# Altium PCB BSPD.PcbDoc
Units mm, origin at the board's own origin, x right, y up, seen from the top; angles counter-clockwise.
Board outline 58.66 x 69.09 mm, 2 copper layers (Top Layer, Bottom Layer), stack 1.671 mm thick; 58 components, 44 nets, 223 pads, 80 vias.
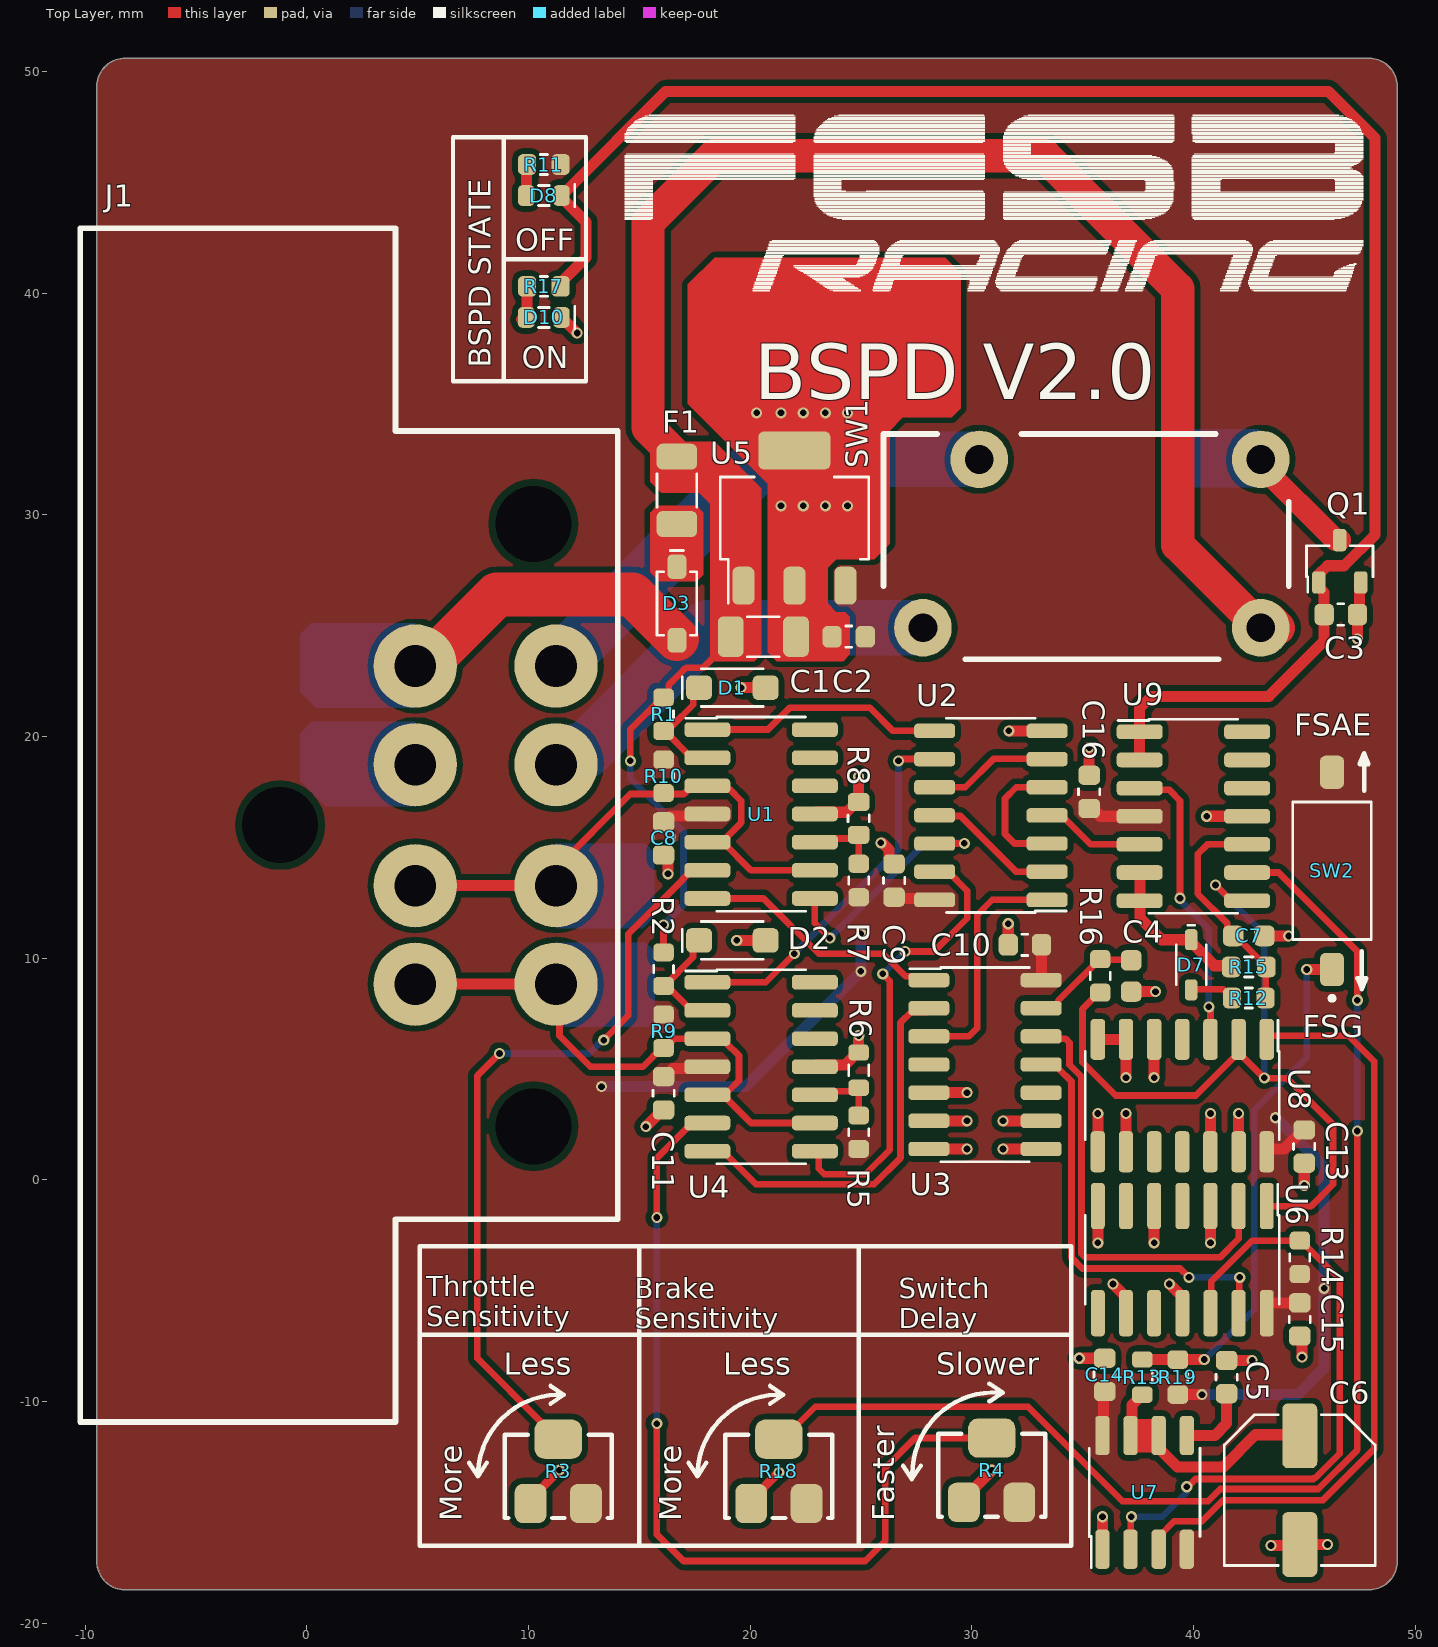
[diagram p0: Top Layer view]
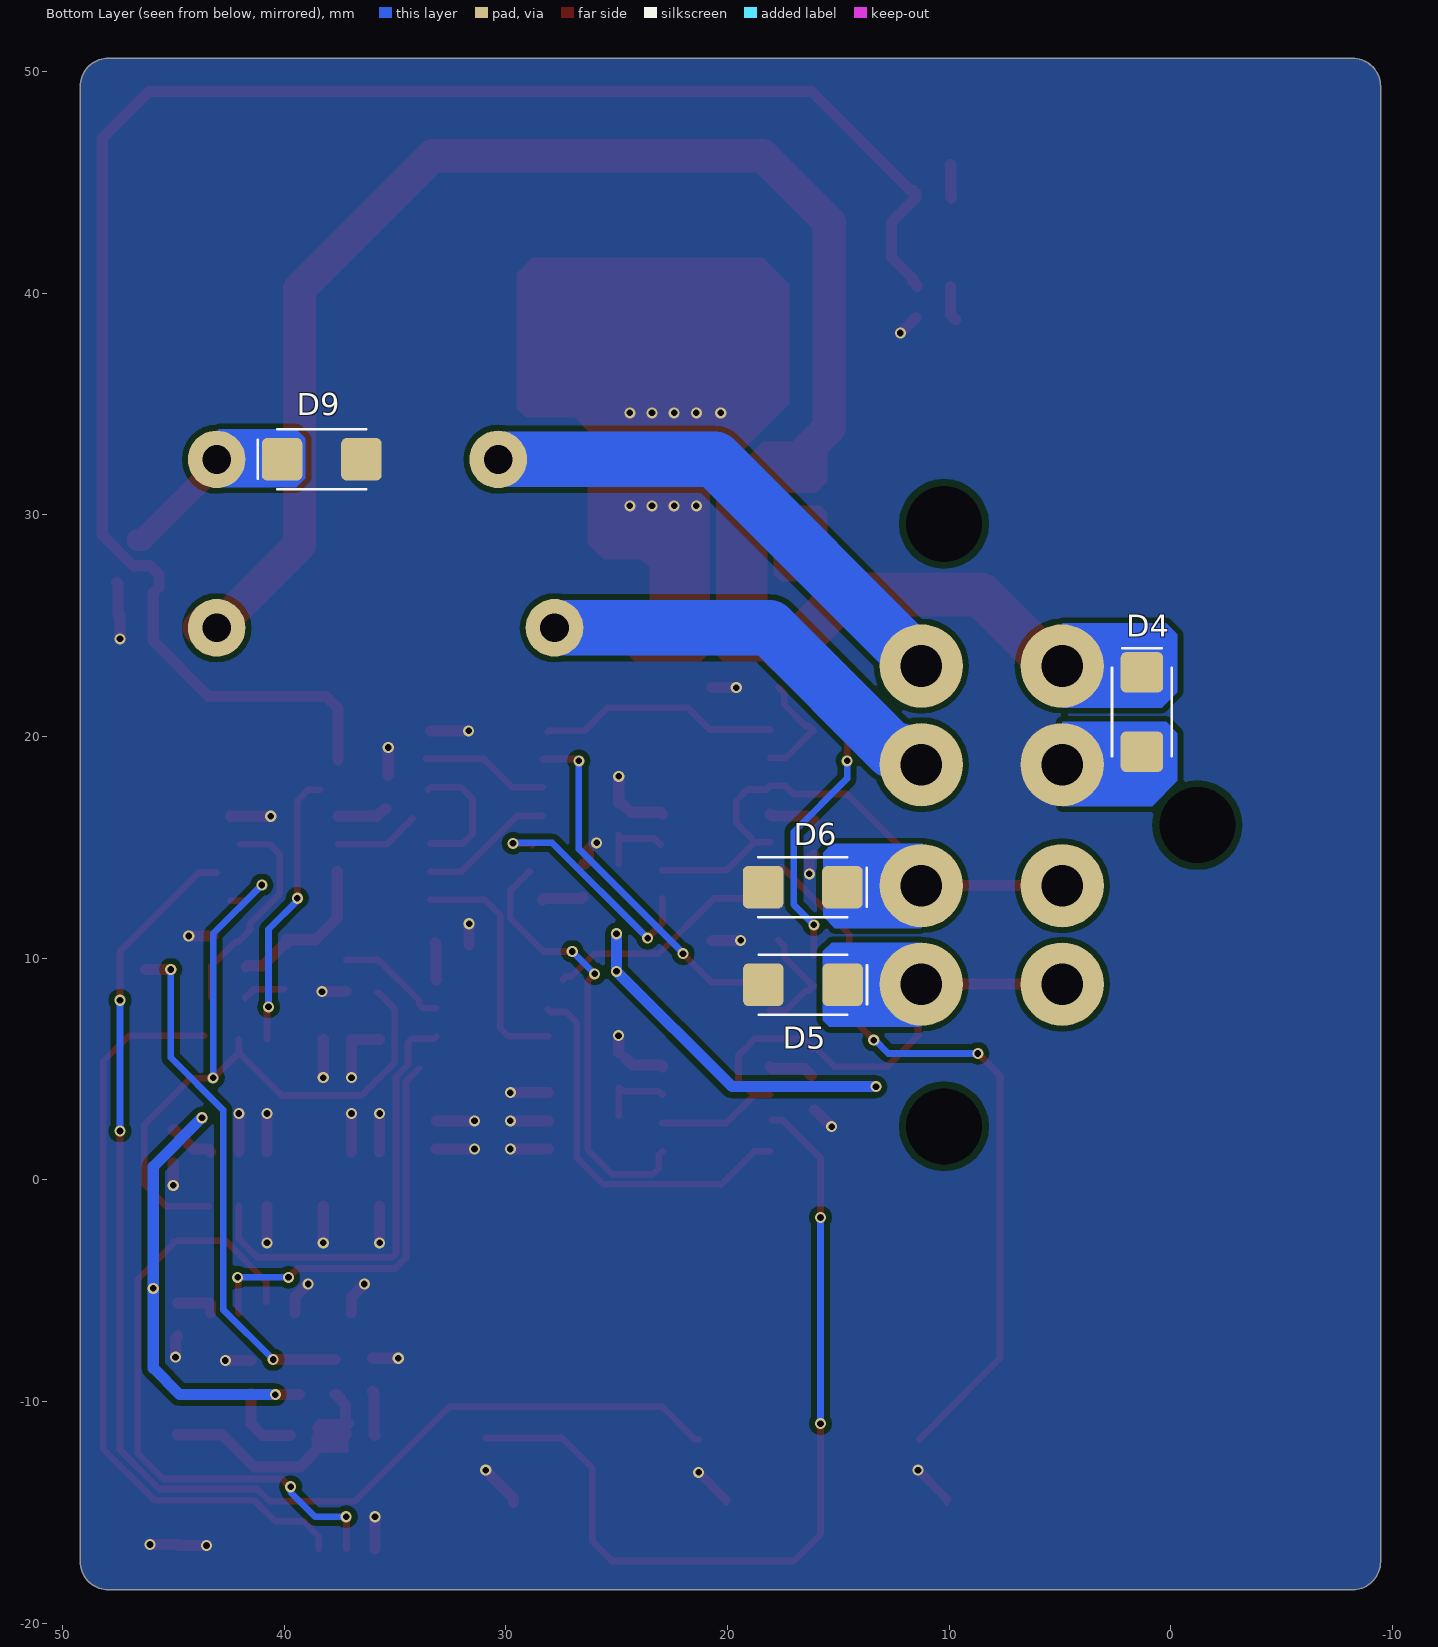
[diagram p1: Bottom Layer view, seen from below]
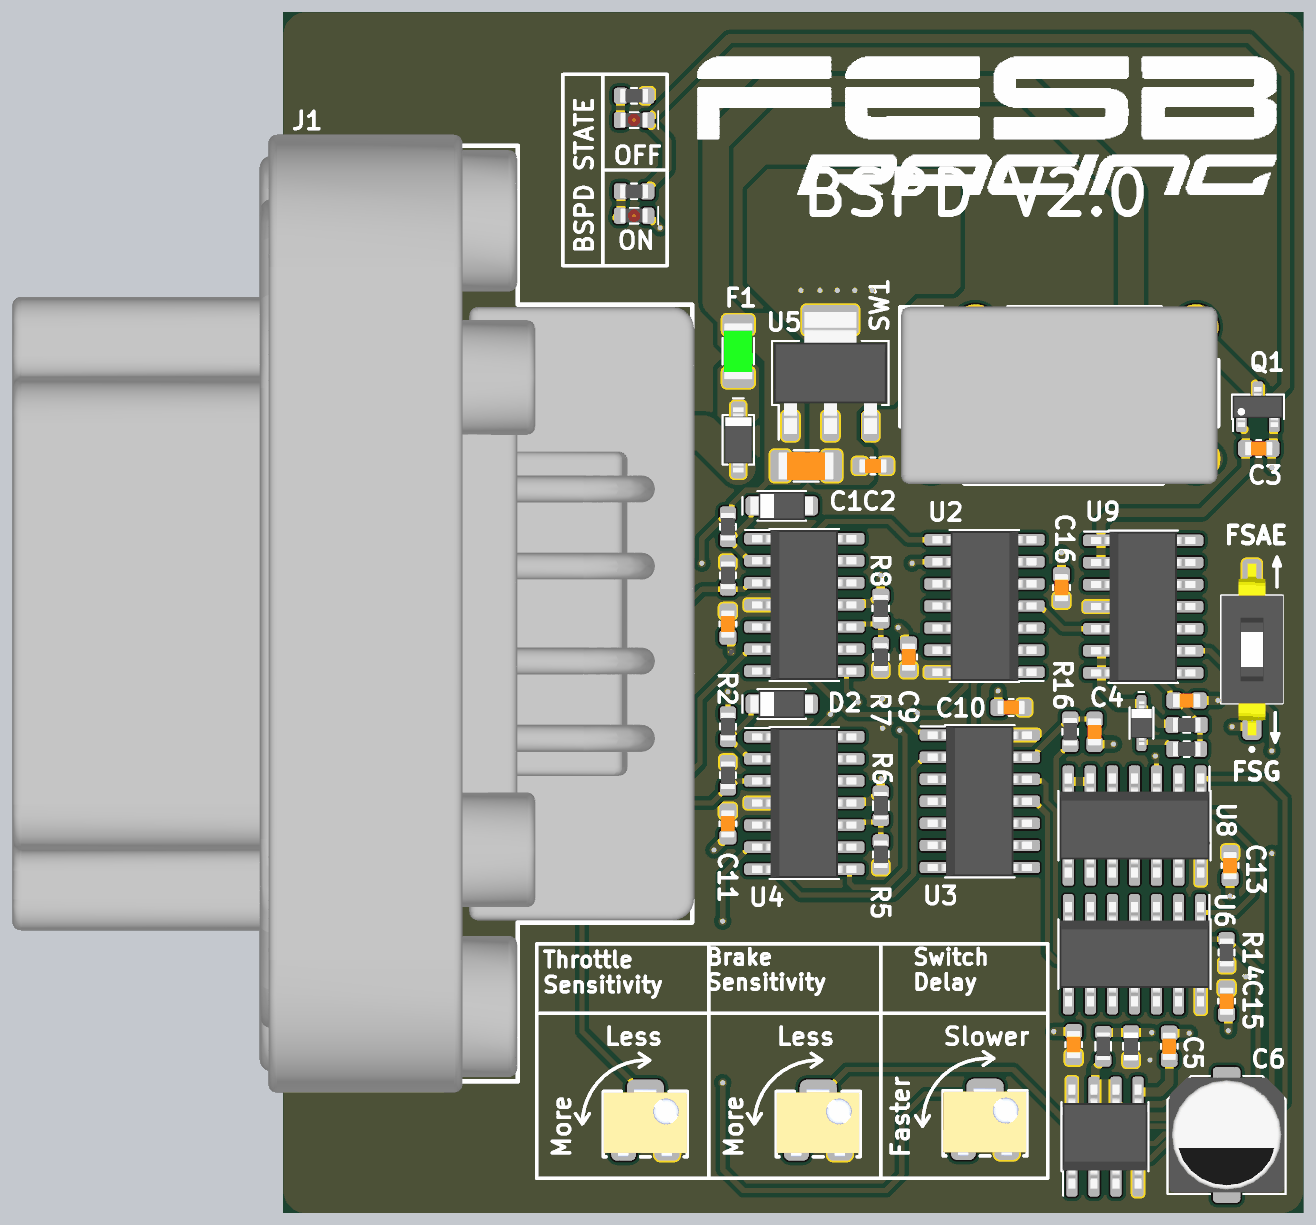
[diagram p2: 3D render of the assembled board from above, using the file's embedded part models]
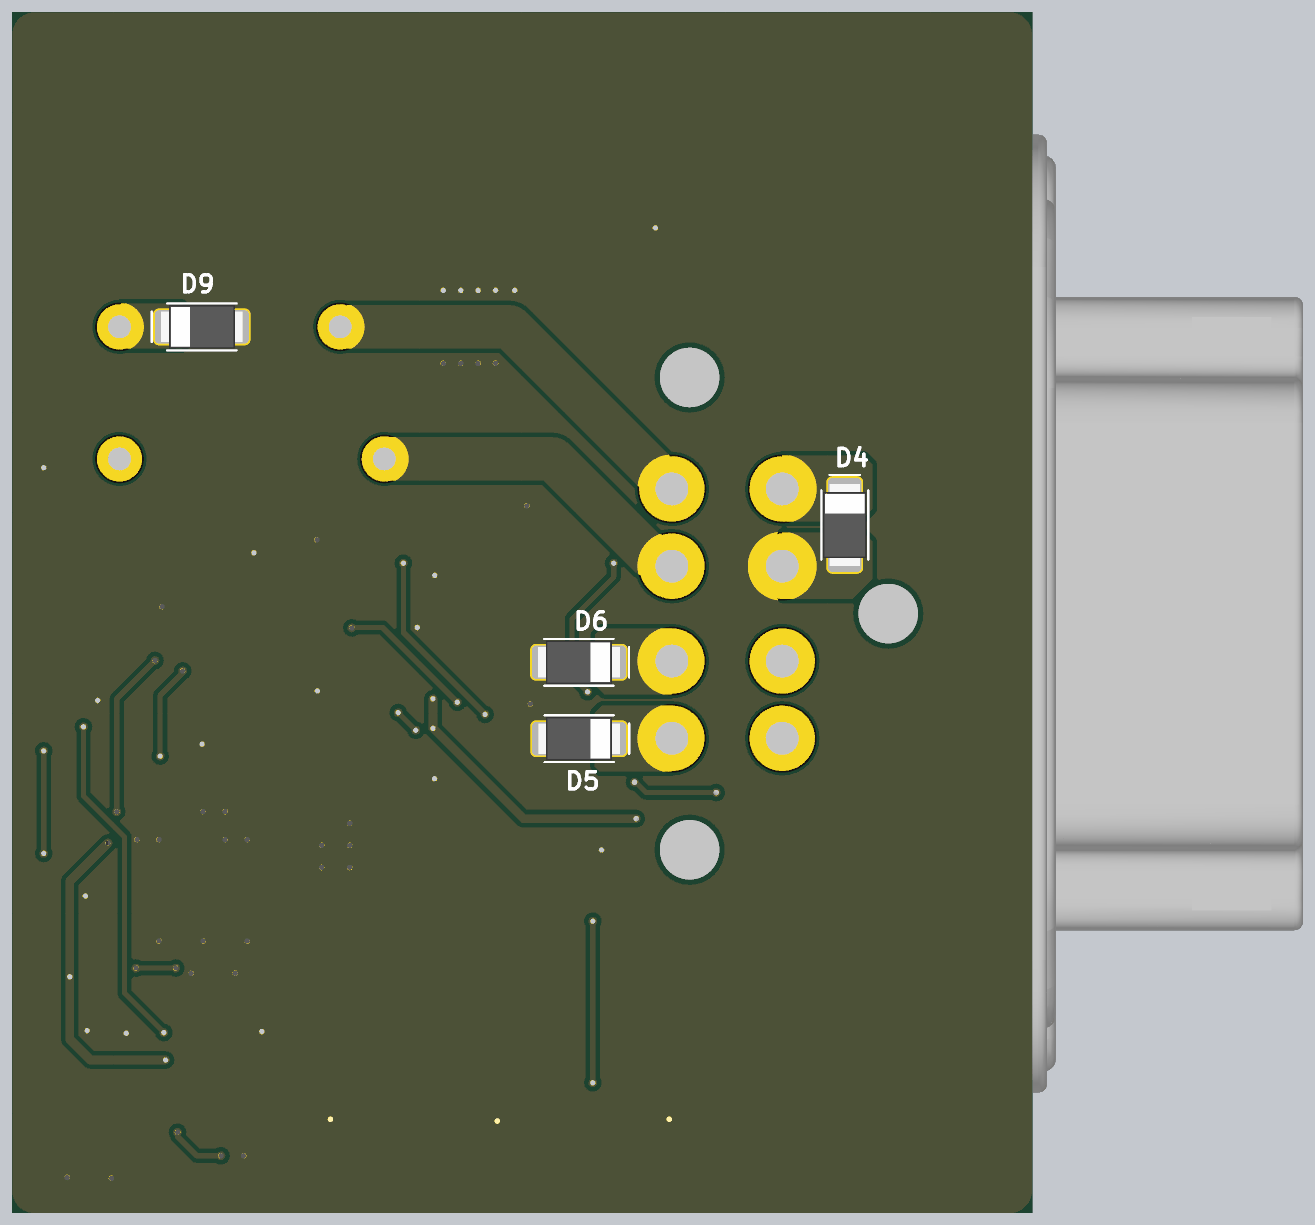
[diagram p3: 3D render of the assembled board from below, using the file's embedded part models]

## Layer stack, top to bottom
Top Solder: solder mask 0.0102, Solder Resist, Dk 3.5
Top Layer: signal copper 0.0356
Dielectric 1: dielectric 1.6, FR-4, Dk 4.8
Bottom Layer: signal copper 0.0356
Bottom Solder: solder mask 0.0102, Solder Resist, Dk 3.5

## Board outline
-9.464,-17.23 -9.464,36.63 ccw(c-9.469,36.63) -9.465,36.633 -9.465,49.33 cw(c-8.2,49.33) -8.2,50.595 47.93,50.595 cw(c47.93,49.33) 49.195,49.33 49.195,-17.23 cw(c47.93,-17.23) 47.93,-18.495 -8.2,-18.495 cw(c-8.2,-18.5) -8.2,-18.495 ccw(c-8.199,-17.23) -8.199,-18.495 -8.2,-18.495 cw(c-8.199,-17.23)

## Design rules (kind name [scope] priority, off if disabled: settings)
Clearance [All] p1: gap=0.254 ignorepadtopadclearanceinfootprint=FALSE except(0.15: Arc-Arc Arc-Track Arc-Text Track-Track Track-Text SMDPad-SMDPad SMDPad-Text THPad-Text Via-Text Fill-Text Poly-Text Region-Text Text-Text; 0.2: Arc-SMDPad Track-SMDPad; 0.3: Arc-Hole Track-Hole SMDPad-Hole THPad-Hole Via-Hole Fill-Hole Poly-Hole Region-Hole Text-Hole; 0.33: Arc-THPad Track-THPad SMDPad-THPad; 0.6: THPad-THPad)
ComponentClearance [All] p1: gap=0 collisioncheckmode=3 verticalgap=0.254 showdistances=FALSE
DiffPairsRouting [All] p1: maxlimit=0.254 minlimit=0.254 mostfreqgap=0.254 substack1={58F21626-D0D5-40B9-8704-3E12BE209A0A} toplayer_{58f21626-d0d5-40b9-8704-3e12be209a0a}_minwidth=0.381 toplayer_{58f21626-d0d5-40b9-8704-3e12be209a0a}_maxwidth=0.381 toplayer_{58f21626-d0d5-40b9-8704-3e12be209a0a}_prefwidth=0.381 bottomlayer_{58f21626-d0d5-40b9-8704-3e12be209a0a}_minwidth=0.381 bottomlayer_{58f21626-d0d5-40b9-8704-3e12be209a0a}_maxwidth=0.381 bottomlayer_{58f21626-d0d5-40b9-8704-3e12be209a0a}_prefwidth=0.381 toplayer_minwidth=0.381 toplayer_maxwidth=0.381 toplayer_prefwidth=0.381 bottomlayer_minwidth=0.381 bottomlayer_maxwidth=0.381 bottomlayer_prefwidth=0.381 substack2={72114507-FBA7-46C7-B002-64124F889A9F} toplayer_{72114507-fba7-46c7-b002-64124f889a9f}_minwidth=0.381 toplayer_{72114507-fba7-46c7-b002-64124f889a9f}_maxwidth=0.381 toplayer_{72114507-fba7-46c7-b002-64124f889a9f}_prefwidth=0.381 bottomlayer_{72114507-fba7-46c7-b002-64124f889a9f}_minwidth=0.381 bottomlayer_{72114507-fba7-46c7-b002-64124f889a9f}_maxwidth=0.381 bottomlayer_{72114507-fba7-46c7-b002-64124f889a9f}_prefwidth=0.381 maxuncoupledlength=12.7
Height [All] p1: minheight=0 maxheight=999 prefheight=0
HoleSize [All] p1: absolutevalues=TRUE maxlimit=6.3 minlimit=0.2 maxpercent=80.000 minpercent=20.000
MinimumAnnularRing [All] p1: minimumring=0.05
MinimumSolderMaskSliver [All] p1: minsoldermaskwidth=0
PlaneClearance [All] p1: clearance=0.3
PlaneConnect [All] p1: planeconnectstyle=Direct reliefexpansion=0.508 reliefentries=4 reliefconductorwidth=0.254 reliefairgap=0.254
PolygonConnect [All] p1: connectstyle=Direct reliefconductorwidth=0.254 reliefentries=4 polygonreliefangle="90 Angle" airgapwidth=0.254
RoutingVias [All] p1: holewidth=0.3 width=0.5 viastyle="Through Hole" minholewidth=0.2 minwidth=0.45 maxholewidth=1 maxwidth=0.6
SilkToSilkClearance [All] p1: silktosilkclearance=0.15
SilkToSolderMaskClearance [IsPad] p1: minsilkscreentomaskgap=0.1 clearancetoexposedcopper=TRUE
SolderMaskExpansion [All] p1: expansion=0.102 istentingtop=FALSE
Width [All] p1: maxlimit=10 minlimit=0.2 preferedwidth=0.254 substack1={58F21626-D0D5-40B9-8704-3E12BE209A0A} substack2={72114507-FBA7-46C7-B002-64124F889A9F}
21 further rules are at their usual default settings.

## Classes and differential pairs
component class "Short to VCC and NC protection": D1 D2 R1 R2 U1 U4
component class "Short to GND protection": R5 R6 R7 R8
component class "Detection Circuit": R3 R4 U3
component class BSPD: C1 C2 C3 C4 C5 C6 C7 C8 C9 C10 C11 C13 C14 C15 C16 D3 D4 D5 D6 D7 D8 D9 D10 F1 J1 Q1 R9 R10 R11 R12 R13 R14 R15 R16 R17 R18 R19 SW1 SW2 U2 U5 U6 U7 U8 U9

## Components (designator, comment, footprint, x,y, rotation, side; value= is the part's Value field where it differs from the comment)
C1 "330nF" CAPC320X160X90L50N 20.6,24.5 r180 top
C2 "100nF" CAPC160X80X87L35N 24.45,24.5 r0 top
C3 "10nF" CAPC160X80X87L35N 46.65,25.5 r180 top
C4 "10uF" CAPC160X80X90L40N 37.2,9.195 r270 top
C5 "10nF" CAPC160X80X87L35N 41.5,-8.9 r270 top
C6 "100uF" CAPAE660X770D660L220X65N 44.8,-14 r270 top
C7 "10uF" CAPC160X80X90L40N 42.5,11 r0 top
C8 "100nF" CAPC160X80X87L35N 16.1,15.4 r270 top
C9 "100nF" CAPC160X80X87L35N 26.5,13.5 r90 top
C10 "100nF" CAPC160X80X87L35N 32.4,10.6 r180 top
C11 "100nF" CAPC160X80X87L35N 16.1,3.9 r270 top
C13 "100nF" CAPC160X80X87L35N 45,1.5 r270 top
C14 "100nF" CAPC160X80X87L35N 36,-8.8 r90 top
C15 "100nF" CAPC160X80X87L35N 44.8,-6.3 r270 top
C16 "100nF" CAPC160X80X87L35N 35.3,17.5 r90 top
D1 "4.75V" SODFL360X160X130L80X100N 19.2,22.2 r0 top
D2 "4.75V" SODFL360X160X130L80X100N 19.2,10.8 r0 top
D3 "MBR0540" SOD375X160X128L31X60N 16.7,26 r270 top
D4 "PTVS22VP1UP" SODFL470X250X110L130X175N 1.3,21.1 r270 bottom
D5 "PTVS5V0P1UP" SODFL470X250X110L130X175N 16.59,8.8 r0 bottom
D6 "PTVS5V0P1UP" SODFL470X250X110L130X175N 16.6,13.2 r0 bottom
D7 "MMDL6050T1G" SOD250X125X100L13X32N 39.9,9.7 r270 top
D8 "Red LED" LEDC160X80X50L30N 10.7,44.4 r180 top
D9 "PTVS22VP1UP" SODFL470X250X110L130X175N 38.3,32.5 r180 bottom
D10 "Green LED" LEDC160X80X50L30N 10.7,38.9 r180 top
F1 "250mA" FUSC325X165X75L42N 16.7,31.1 r90 top
J1 "DT13-08PB" DT13-08PB 5.025,16 r90 top
Q1 "2N7002" SOT23-3P95_230X110L30X43N 46.6,27.9 r0 top
R1 "1.76K" RESC160X80X50L30N 16.1,21 r270 top
R2 "1.76K" RESC160X80X50L30N 16.1,9.5 r270 top
R3 "10K" RESDFN3_475X200X100L160X130N 11.35,-13.15 r0 top
R4 "10K" RESDFN3_475X200X100L160X130N 30.9,-13.1 r0 top
R5 "100K" RESC160X80X50L30N 24.9,2.145 r270 top
R6 "6.34K" RESC160X80X55L25N 24.9,4.945 r90 top
R7 "100K" RESC160X80X50L30N 24.9,13.5 r270 top
R8 "16.2K" RESC157X85X50L30N 24.9,16.3 r270 top
R9 "100K" RESC160X80X50L30N 16.1,6.7 r90 top
R10 "100K" RESC160X80X50L30N 16.1,18.2 r90 top
R11 "470R" RESC160X80X50L30N 10.7,45.8 r180 top
R12 "330R" RESC160X80X50L30N 42.5,8.2 r180 top
R13 "90.9K" RESC160X80X55L25N 37.7,-8.9 r90 top
R14 "10K" RESC160X80X50L30N 44.8,-3.5 r270 top
R15 "72.3K" RESC160X80X60L30N 42.5,9.6 r180 top
R16 "10K" RESC160X80X50L30N 35.8,9.2 r270 top
R17 "470R" RESC160X80X50L30N 10.7,40.3 r180 top
R18 "10K" RESDFN3_475X200X100L160X130N 21.3,-13.15 r0 top
R19 "10M" RESC160X80X55L30N 39.3,-8.9 r90 top
SW1 "SPST-NO" 655414191282 43.04,32.5 r180 top
SW2 "DS04-254-2-01BK-SMT-TR" SW_DS04-254-2-01BK-SMT-TR 46.3,13.8 r90 top
U1 "AD8544ARZ" SOIC14P127_865X600X175L83X41N 20.5,16.5 r270 top
U2 "CD4071BM" SOIC14P127_865X600X175L70X42N 30.865,16.44 r90 top
U3 "HEF4081BT" SOIC14P127_865X600X175L70X42N 30.6,5.2 r270 top
U4 "AD8544ARZ" SOIC14P127_865X600X175L83X41N 20.5,5.1 r270 top
U5 "UA78M05" SOT223-4P230_700X180L80X75N 22,29.85 r0 top
U6 "HCF40106YM013TR" SOIC14P127_865X600X175L88X40N 39.5,-3.6 r180 top
U7 "LM555CMX" SOIC8P127_490X599X175L104X41N 37.8,-14.1 r0 top
U8 "CD4071BM" SOIC14P127_865X600X175L70X42N 39.5,3.8 r180 top
U9 "AD8544ARZ" SOIC14P127_865X600X175L83X41N 40,16.4 r270 top

## Footprints (in the part's own frame and the unit in brackets; to place one, negate y for a bottom-side part, rotate by r counter-clockwise, add the part's x,y. Pads: shape width x height; smd on the part's side, far side on the other; paste and mask are expansions set on the pad)
655414191282 [mm]
  round 2.6 hole 1.3: 1(0,7.6) 2(0,0) 3(12.7,0) 4(15.24,7.6)
  silkscreen extent -1.27,-1.14 17.02,9.02, body extent -1.27,-1.16 17.02,9.04, height 14.61
CAPAE660X770D660L220X65N [mm] "Capacitor, Aluminum Electrolytic; 6.60 mm L X 6.60 mm W X 7.70 mm H body"
  rrect32% 2.92x1.58 smd: 1(-2.45,0) 2(2.45,0)
  silkscreen extent -3.4,-3.4 3.4,3.4, body extent -4.11,-3.6 4.11,3.6, height 7.7
CAPC160X80X87L35N [mm] "Capacitor, Chip; 1.60 mm L X 0.80 mm W X 0.87 mm H body"
  rrect51% 0.87x0.97 smd: 1(-0.75,0) 2(0.75,0)
  silkscreen extent -0.14,-0.48 0.14,0.48, body extent -1.39,-0.69 1.39,0.69, height 0.87
CAPC160X80X90L40N [mm] "Capacitor, Chip; 1.60 mm L X 0.80 mm W X 0.90 mm H body"
  rrect50% 0.92x0.93 smd: 1(-0.705,0) 2(0.705,0)
  body extent -1.38,-0.67 1.38,0.67, height 2
CAPC320X160X90L50N [mm] "Capacitor, Chip; 3.20 mm L X 1.60 mm W X 0.90 mm H body"
  rrect43% 1.16x1.82 smd: 1(-1.475,0) 2(1.475,0)
  silkscreen extent -0.71,-0.9 0.71,0.9, body extent -2.27,-1.12 2.27,1.12, height 1
DT13-08PB [mm]
  round 3.76 hole 1.88: 1(-7.175,-6.225) 2(-2.73,-6.225) 3(2.73,-6.225) 4(7.175,-6.225) 5(7.175,0.125) 6(2.73,0.125) 7(-2.73,0.125) 8(-7.175,0.125)
  round 1.524 hole 3.43 unplated: ""(-13.59,-5.205) ""(0,6.225) ""(13.59,-5.205)
  silkscreen extent -26.92,-9.02 26.92,15.24, body extent -27.56,-10.2 27.56,30.3, height 36.13
FUSC325X165X75L42N [mm] "Fuse, Chip; 3.25 mm L X 1.65 mm W X 0.75 mm H body"
  rrect43% 1.17x1.82 smd: 1(-1.52,0) 2(1.52,0)
  silkscreen extent -0.75,-0.9 0.75,0.9, body extent -2.31,-1.11 2.31,1.11, height 1
LEDC160X80X50L30N [mm] "LED, Chip; 1.60 mm L X 0.80 mm W X 0.50 mm H body"
  rrect51% 0.74x0.93 smd: A(0.795,0) C(-0.795,0)
  silkscreen extent -1.4,-0.51 0.25,0.51, body extent -0.8,-0.4 0.8,0.4, height 0.85
RESC157X85X50L30N [mm] "Resistor, Chip; 1.575 mm L X 0.85 mm W X 0.50 mm H body"
  rrect49% 0.81x0.98 smd: 1(-0.74,0) 2(0.74,0)
  silkscreen extent -0.16,-0.48 0.16,0.48, body extent -1.35,-0.69 1.35,0.69, height 1
RESC160X80X50L30N [mm] "Resistor, Chip; 1.60 mm L X 0.80 mm W X 0.50 mm H body"
  rrect51% 0.82x0.93 smd: 1(-0.755,0) 2(0.755,0)
  silkscreen extent -0.17,-0.45 0.17,0.45, body extent -1.37,-0.67 1.37,0.67, height 1
RESC160X80X55L25N [mm] "Resistor, Chip; 1.60 mm L X 0.80 mm W X 0.55 mm H body"
  rrect51% 0.74x0.93 smd: 1(-0.795,0) 2(0.795,0)
  silkscreen extent -0.25,-0.45 0.25,0.45, body extent -1.37,-0.67 1.37,0.67, height 1
RESC160X80X55L30N [mm] "Resistor, Chip; 1.60 mm L X 0.80 mm W X 0.55 mm H body"
  rrect50% 0.84x0.93 smd: 1(-0.79,0) 2(0.79,0)
  silkscreen extent -0.19,-0.45 0.19,0.45, body extent -1.4,-0.66 1.4,0.66, height 0.54
RESC160X80X60L30N [mm] "Resistor, Chip; 1.60 mm L X 0.80 mm W X 0.60 mm H body"
  rrect50% 0.84x0.93 smd: 1(-0.79,0) 2(0.79,0)
  silkscreen extent -0.19,-0.45 0.19,0.45, body extent -1.41,-0.67 1.41,0.67, height 1
RESDFN3_475X200X100L160X130N [mm] "Resistor, Dual Flat No-Lead (DFN 3 Pins), 2.90 mm pitch; 3 pin, 4.75 mm L X 2.00 mm W X 1.00 mm H body"
  rrect50% 1.43x1.77 smd: 1(-1.25,-1.45) 3(1.25,-1.45)
  rrect50% 2.13x1.77 smd: 2(0,1.45)
  silkscreen extent -2.41,-2.11 2.41,1.65, body extent -2.41,-2.1 2.39,1.8, height 5.3
SOD250X125X100L13X32N [mm] "Diode, Small Outline Diode (SOD); 1.70 mm L X 1.25 mm W X 1.00 mm H body"
  rrect50% 0.95x0.56 smd: A(1.13,0) C(-1.13,0)
  silkscreen extent -1.79,-0.68 0.9,0.68, body extent -1.81,-0.88 1.81,0.88, height 1
SOD375X160X128L31X60N [mm] "Diode, Small Outline Diode (SOD); 2.70 mm L X 1.60 mm W X 1.28 mm H body"
  rrect49% 1.1x0.85 smd: A(1.66,0) C(-1.66,0)
  silkscreen extent -2.39,-0.9 1.43,0.9, body extent -2.41,-1.1 2.41,1.1, height 1.28
SODFL360X160X130L80X100N [mm] "Diode, Small Outline Diode Flat Lead (SODFL); 2.675 mm L X 1.60 mm W X 1.30 mm H body"
  rrect45% 1.17x1.11 smd: A(1.5,0) C(-1.5,0)
  silkscreen extent -2.26,-0.85 1.4,0.85, body extent -2.23,-1 2.23,1, height 1.3
SODFL470X250X110L130X175N [mm] "Diode, Small Outline Diode Flat Lead (SODFL); 3.80 mm L X 2.50 mm W X 1.10 mm H body"
  rrect27% 1.83x1.92 smd: A(1.79,0) C(-1.79,0)
  silkscreen extent -2.89,-1.35 2,1.35, body extent -2.35,-1.25 2.35,1.25, height 1.1
SOIC8P127_490X599X175L104X41N [mm] "Small Outline IC (SOIC), 1.27 mm pitch; 8 pin, 4.905 mm L X 3.895 mm W X 1.75 mm H body"
  rrect50% 0.64x1.77 smd: 1(-1.905,-2.565) 2(-0.635,-2.565) 3(0.635,-2.565) 4(1.905,-2.565) 5(1.905,2.565) 6(0.635,2.565) 7(-0.635,2.565) 8(-1.905,2.565)
  silkscreen extent -2.5,-3.39 2.5,1.99, body extent -2.45,-3 2.45,3, height 1.75
SOIC14P127_865X600X175L70X42N [mm] "Small Outline IC (SOIC), 1.27 mm pitch; 14 pin, 8.65 mm L X 3.90 mm W X 1.75 mm H body"
  rrect49% 0.65x1.85 smd: 1(-3.81,-2.535) 2(-2.54,-2.535) 3(-1.27,-2.535) 4(0,-2.535) 5(1.27,-2.535) 6(2.54,-2.535) 7(3.81,-2.535) 8(3.81,2.535) 9(2.54,2.535) 10(1.27,2.535) 11(0,2.535) 12(-1.27,2.535) 13(-2.54,2.535) 14(-3.81,2.535)
  silkscreen extent -4.38,-3.4 4.38,2, body extent -4.57,-3.66 4.57,3.66, height 1.75
SOIC14P127_865X600X175L83X41N [mm] "Small Outline IC (SOIC), 1.27 mm pitch; 14 pin, 8.65 mm L X 3.90 mm W X 1.75 mm H body"
  rrect52% 0.66x2.07 smd: 1(-3.81,-2.425) 2(-2.54,-2.425) 3(-1.27,-2.425) 4(0,-2.425) 5(1.27,-2.425) 6(2.54,-2.425) 7(3.81,-2.425) 8(3.81,2.425) 9(2.54,2.425) 10(1.27,2.425) 11(0,2.425) 12(-1.27,2.425) 13(-2.54,2.425) 14(-3.81,2.425)
  silkscreen extent -4.38,-3.4 4.38,2, body extent -4.58,-3.66 4.58,3.66, height 1.75
SOIC14P127_865X600X175L88X40N [mm] "Small Outline IC (SOIC), 1.27 mm pitch; 14 pin, 8.65 mm L X 3.90 mm W X 1.75 mm H body"
  rrect51% 0.63x2.09 smd: 1(-3.81,-2.415) 2(-2.54,-2.415) 3(-1.27,-2.415) 4(0,-2.415) 5(1.27,-2.415) 6(2.54,-2.415) 7(3.81,-2.415) 8(3.81,2.415) 9(2.54,2.415) 10(1.27,2.415) 11(0,2.415) 12(-1.27,2.415) 13(-2.54,2.415) 14(-3.81,2.415)
  silkscreen extent -4.38,-3.4 4.38,2, body extent -4.58,-3.66 4.58,3.66, height 1.75
SOT23-3P95_230X110L30X43N [mm] "Small Outline Transistor (SOT23), 0.95 mm pitch; 3 pin, 2.90 mm L X 1.30 mm W X 1.10 mm H body"
  rrect49% 0.61x1.01 smd: 1(-0.95,-0.955) 2(0.95,-0.955) 3(0,0.955)
  silkscreen extent -1.5,-1.4 1.5,0.7, body extent -1.7,-1.66 1.7,1.66, height 1.1
SOT223-4P230_700X180L80X75N [mm] "Small Outline Transistor (SOT223), 2.30 mm pitch; 4 pin, 6.50 mm L X 3.50 mm W X 1.80 mm H body"
  rrect51% 0.99x1.71 smd: 1(-2.3,-3.05) 2(0,-3.05) 3(2.3,-3.05)
  rrect29% 3.25x1.71 smd: 2(0,3.05)
  silkscreen extent -3.35,-3.85 3.35,1.85, body extent -3.55,-4.1 3.55,4.1, height 1.8
SW_DS04-254-2-01BK-SMT-TR [mm]
  rrect50% 1.5x1.1 smd: 1(-4.313,0.046) 2(4.587,0.046)
  silkscreen extent -5.71,-1.72 3.24,1.82, body extent -5.31,-1.97 5.59,2.07, height 4.01

## Part data
C1: library part C_1206_330nF_50V, Capacitor Case Style=1206, Manufacturer Part Number=1206B334K500CT, Supplier Part Number=791-1206B334K500CT, Voltage Rating=50V, ComponentLinkDescription=Datasheet, ComponentLinkURL=https://hr.mouser.com/datasheet/2/210/WTC_MLCC_Gen, FR_SN=C_NP-03, Part Number=C_1206_330nF_50V
C2 C8 C9 C10 C11 C13 C14 C15 C16: library part C_0603_100nF_50V, Capacitor Case Style=0603, Manufacturer Part Number=CC0603MRY5V9BB104, Supplier Part Number=603-C0603MRY5V9BB104, Voltage Rating=50V, ComponentLinkDescription=Datasheet, ComponentLinkURL=https://hr.mouser.com/datasheet/2/212/KEM_C1027_X7, FR_SN=C_NP-02, Part Number=C_0603_100nF_50V
C3 C5: library part C_0603_10nF_100V, Capacitor Case Style=0603, Manufacturer Part Number=885012206114, Supplier Part Number=710-885012206114, Voltage Rating=100V, ComponentLinkDescription=Datasheet, ComponentLinkURL=https://hr.mouser.com/datasheet/2/445/885012206114, FR_SN=C_NP-07, Part Number=C_0603_10nF_100V
C4 C7: library part C_0603_10uF_16V, Capacitor Case Style=0603, Manufacturer Part Number=GRM188R61C106KAALD, Supplier Part Number=81-GRM188R61C106KALD, Voltage Rating=16V, ComponentLinkDescription=Datasheet, ComponentLinkURL=https://hr.mouser.com/datasheet/2/281/murata_03052, FR_SN=C_NP-12, Part Number=C_0603_10uF_16V
C6: library part C_100uF_25V, Capacitor Case Style=Radial, Manufacturer Part Number=865080445010, Supplier Part Number=710-865080445010, Voltage Rating="25 V", ComponentLinkDescription=Datasheet, ComponentLinkURL=https://hr.mouser.com/datasheet/2/445/865080445010-1726566.pdf, FR_SN=C_P-07, Part Number=C_100uF_25V
D1 D2: library part D_4.75V_625mW, Diode Case Style=SOD-123-2, Manufacturer Part Number=PDZ4.7BGWX, Power Dissipation=625mW, Supplier Part Number=771-PDZ4.7BGWX, Tolerance="2 %", ComponentLinkDescription=Datasheet, ComponentLinkURL=https://hr.mouser.com/datasheet/2/916/PDZ-GW_SER-1599748.pdf, FR_SN=D_Z-03, Part Number=D_4.75V_625mW, Voltage Rating=4.75V
D3: Diode Case Style=SOD-123, Forward Current="500 mA", Max Reverse Voltage="40 V", Supplier Part Number=512-MBR0540, ComponentLinkDescription=Datasheet, ComponentLinkURL=https://hr.mouser.com/datasheet/2/308/MBR0540-1306677.pdf, FR_SN=D_S-01, Manufacturer Part Number=MBR0540, Part Number=MBR0540
D4 D9: library part TVS_22V, Diode Case Style=SOD-128, Manufacturer Part Number=PTVS22VP1UP,115, Peak Pulse Power=600W, Stand-off Voltage=22V, Supplier Part Number=771-PTVS22VP1UP115, ComponentLinkDescription=Datasheet, ComponentLinkURL=https://hr.mouser.com/datasheet/2/916/PTVSXP1UP_SER-1320701.pdf, FR_SN=TVS-02, Part Number=TVS_22V
D5 D6: library part TVS_5V, Diode Case Style=SOD-128, Manufacturer Part Number=PTVS5V0P1UP,115, Peak Pulse Power=600W, Stand-off Voltage=5V, Supplier Part Number=771-PTVS5V0P1UP115, ComponentLinkDescription=Datasheet, ComponentLinkURL=https://hr.mouser.com/ProductDetail/Nexperia/PTVS5V0P1UP115?qs=sGAEpiMZZMvD44QvxK4%2FifxZNBzjFSC%252B, FR_SN=TVS_04, Part Number=TVS_5V
D7: Diode Case Style=SOD-323, Forward Current="200 mA", Max Reverse Voltage=70V, Supplier Part Number=863-MMDL6050T1G, ComponentLinkDescription=Datasheet, ComponentLinkURL=https://hr.mouser.com/datasheet/2/308/MMDL6050T1-D-1811964.pdf, Diode Type=Rectifier, FR_SN=D-01, Manufacturer Part Number=MMDL6050T1G, Part Number=MMDL6050T1G, Reverse Recovery Time=4ns
D8: library part LED_Red_60mcd, Diode Case Style=0603, Forward Current=20mA, Manufacturer Part Number=150060SS75000, Max Reverse Voltage=5V, Supplier Part Number=710-150060SS75000, ComponentLinkDescription=Datasheet, ComponentLinkURL=https://hr.mouser.com/datasheet/2/445/150060SS75000-368982.pdf, Diode Type=LED, FR_SN=D_LED-03, Part Number=LED_Red_60mcd
D10: library part LED_Green_20mcd@12V,1.4K, Diode Case Style=SMD, Forward Current=20mA, Manufacturer Part Number=150060VS55040, Max Reverse Voltage=5V, Supplier Part Number=710-150060VS55040, ComponentLinkDescription=Datasheet, ComponentLinkURL=https://hr.mouser.com/datasheet/2/445/150060VS55040-1313752.pdf, Diode Type=LED, FR_SN=D_LED-02, Part Number=LED_Green_20mcd@12V,1.4K
F1: library part F_250mA, Fuse Case Style=1206, Holding Current=500mA, Manufacturer Part Number=0ZCJ0025FF2E, Supplier Part Number=530-0ZCJ0025FF2E, ComponentLinkDescription=Datasheet, ComponentLinkURL=https://hr.mouser.com/datasheet/2/643/0ZCJ_Nov2016-1132002.pdf, FR_SN=F-01, Part Number=F_250mA, Tripping Current=250mA
J1: library part "DT13-08PB 2x4", Supplier Part Number=571-DT13-08PB, ComponentLinkDescription=Datasheet, ComponentLinkURL=https://www.te.com/commerce/DocumentDelivery/DDEController?Action=srchrtrv&DocNm=DT13-08PX&DocType=Customer+Drawing&DocLang=English&PartCntxt=DT13-08PB&DocFormat=pdf, FR_SN=J-17, Manufacturer Part Number=DT13-08PB, Part Number="DT13-08PB 2x4"
Q1: library part Q_N_GSD, Continuous Drain Current Id="120 mA", Drain Source Voltage Uds="60 V", On Resistance Rds(on)="1.2 Ohms", Power Dissipation Pd="200 mW", Supplier Part Number=512-2N7002, Transistor Case Style=SOT-23-3, ComponentLinkDescription=Datasheet, ComponentLinkURL=https://hr.mouser.com/ProductDetail/ON-Semiconductor-Fairchild/2N7002?qs=0dwsXDNhqlz66WJJhrTFjQ%3D%3D, FR_SN=T_M-03, Manufacturer Part Number=2N7002, Part Number=Q_N_GSD
R1 R2: library part R_0603_1.76K_0W1_P, Manufacturer Part Number=RT0603BRD071K76L, Power Rating=100mW, Resistor Case Style=0603, Supplier Part Number=603-RT0603BRD071K76L, Temperature Coefficient="25 PPM / C", ComponentLink1Description=Datasheet, ComponentLink1URL=https://hr.mouser.com/ProductDetail/Yageo/RT0603BRD071K76L?qs=sGAEpiMZZMu61qfTUdNhGyjxuWj6R%252BAvNaA7oRf469yqgHOwdPrDqQ%3D%3D, FR_SN=R-15, Part Number=R_0603_1.76K_0W1_P
R3 R4 R18: library part Trimmer_10K_0W250, Manufacturer Part Number=PVG5A103C03B00, Power Rating=250mW, Resistor Case Style=Vertical, Supplier Part Number=81-PVG5A103C03B00, Temperature Coefficient="150 PPM/C", ComponentLink1Description=Datasheet, ComponentLink1URL=https://hr.mouser.com/datasheet/2/54/pvg5-907351.pdf, FR_SN=Trim-02, Part Number=Trimmer_10K_0W250
R5 R7 R9 R10: library part R_0603_100K_0W1_C, Manufacturer Part Number=CRCW0603100KFKEAC, Power Rating=100mW, Resistor Case Style=0603, Supplier Part Number=71-CRCW0603100KFKEAC, Temperature Coefficient="100 PPM / C", ComponentLink1Description=Datasheet, ComponentLink1URL=https://hr.mouser.com/datasheet/2/427/crcwce3-1223726.pdf, FR_SN=R-34, Part Number=R_0603_100K_0W1_C
R6: library part R_0603_6.34K_0W1, Manufacturer Part Number=AC0603FR-076K34L, Power Rating=100mW, Resistor Case Style=0603, Supplier Part Number=603-AC0603FR-076K34L, Temperature Coefficient="100 PPM / C", ComponentLink1Description=Datasheet, ComponentLink1URL=https://hr.mouser.com/datasheet/2/447/Yageo_PYu_AC_51_RoHS_L_7_1714230-1874691.pdf, FR_SN=R-73, Part Number=R_0603_6.34K_0W1
R8: library part R_0603_16.2K_0W1, Manufacturer Part Number=CRCW060316K2FKEA, Power Rating=100mW, Resistor Case Style=0603, Supplier Part Number=71-CRCW0603-16.2K-E3, Temperature Coefficient="100 PPM/C", ComponentLink1Description=Datasheet, ComponentLink1URL=https://hr.mouser.com/datasheet/2/427/dcrcwe3-1762152.pdf, FR_SN=R-65, Part Number=R_0603_16.2K_0W1
R11 R17: library part R_0603_470R_0W33, Manufacturer Part Number=CRCW0603470RJNEAC, Power Rating=100mW, Resistor Case Style=0603, Supplier Part Number=71-CRCW0603470RJNEAC, Temperature Coefficient="200 PPM / C", ComponentLink1Description=Datasheet, ComponentLink1URL=https://hr.mouser.com/datasheet/2/219/SG73G-1316861.pdf, FR_SN=R-03, Part Number=R_0603_470R_0W33
R12: library part R_0603_330R_0W1, Manufacturer Part Number=CRCW0603330RFKEAC, Power Rating="100 mW", Resistor Case Style=0603, Supplier Part Number=71-CRCW0603330RFKEAC, Temperature Coefficient="100 PPM / C", ComponentLink1Description=Datasheet, ComponentLink1URL=https://hr.mouser.com/datasheet/2/427/crcwce3-1223726.pdf, FR_SN=R-26, Part Number=R_0603_330R_0W1
R13: library part R_0603_90.9K_0W1, Manufacturer Part Number=RC0603FR-0790K9L, Power Rating=100mW, Resistor Case Style=0603, Supplier Part Number=603-RC0603FR-0790K9L, Temperature Coefficient="100 PPM / C", ComponentLink1Description=Datasheet, ComponentLink1URL=https://hr.mouser.com/datasheet/2/447/PYu-RC_Group_51_RoHS_L_10-1664068.pdf, FR_SN=R-72, Part Number=R_0603_90.9K_0W1
R14 R16: library part R_0603_10K_0W062_P, Manufacturer Part Number=APC0603B10K0N, Power Rating=62.5mW, Resistor Case Style=0603, Supplier Part Number=284-APC0603B10K0N, Temperature Coefficient="25 PPM / C", ComponentLink1Description=Datasheet, ComponentLink1URL=https://hr.mouser.com/datasheet/2/303/APC-1-15.34-911303.pdf, FR_SN=R-11, Part Number=R_0603_10K_0W062_P
R15: library part R_0603_72.3K_0W062, Manufacturer Part Number=RN731JTTD7232D100, Power Rating="62.5 mW", Resistor Case Style=0603, Supplier Part Number=660-RN731JTD7232D100, Temperature Coefficient="100 PPM / C", ComponentLink1Description=Datasheet, ComponentLink1URL=https://hr.mouser.com/datasheet/2/219/KOA_Speer_RN73__1_-1894048.pdf, FR_SN=R-74, Part Number=R_0603_72.3K_0W062
R19: library part R_0603_10M_0W1, Manufacturer Part Number=CRCW060310M0JNEAC, Power Rating=100mW, Resistor Case Style=0603, Supplier Part Number=71-CRCW060310M0JNEAC, Temperature Coefficient="200 PPM / C", ComponentLink1Description=Datasheet, ComponentLink1URL=https://hr.mouser.com/datasheet/2/427/crcwce3-1762584.pdf, FR_SN=R-75, Part Number=R_0603_10M_0W1
SW1: library part Relay_Non-L_TH, Manufacturer Part Number=4-1419128-2, Supplier Part Number=655-4-1419128-2, Switch Case Style=Relay, ComponentLinkDescription=Datasheet, ComponentLinkURL=https://www.te.com/commerce/DocumentDelivery/DDEController?Action=srchrtrv&DocNm=1461104&DocType=Customer+Drawing&DocLang=English&PartCntxt=4-1419128-2&DocFormat=pdf, Configuration=SPST-NO, FR_SN=SW-03, Part Number=Relay_Non-L_TH, Type=Non-Latching
SW2: library part Switch_1P, Supplier Part Number=490-DS04254201BK-STR, Switch Case Style=DIP, ComponentLinkDescription=Datasheet, ComponentLinkURL=https://hr.mouser.com/datasheet/2/670/ds04_254_smt-1777718.pdf, Configuration=SPST, FR_SN=SW-04, Manufacturer Part Number=DS04-254-2-01BK-SMT-TR, Part Number=Switch_1P, Type="DIP Switches"
U1 U4 U9: library part AD8544, IC Case Style=SOIC-14, Manufacturer Part Number=AD8544ARZ-REEL, Supplier Part Number=584-AD8544ARZ-R, Category="OP Amp", ComponentLinkDescription=Datasheet, ComponentLinkURL=https://hr.mouser.com/datasheet/2/609/AD8541_8542_8544-1502176.pdf, FR_SN=U_Analog-15, Part Number=AD8544
U2 U8: IC Case Style=SO-14, Supplier Part Number=595-CD4071BM, Category="Logic OR Gate", ComponentLinkDescription=Datasheet, ComponentLinkURL=https://www.ti.com/general/docs/suppproductinfo.tsp?distId=26&gotoUrl=http%3A%2F%2Fwww.ti.com%2Flit%2Fgpn%2Fcd4071b, FR_SN=IC_Misc-21, Manufacturer Part Number=CD4071BM, Part Number=CD4071BM
U3: IC Case Style=SO-14, Manufacturer Part Number=HEF4081BT,653, Supplier Part Number=771-HEF4081BTD-T, Category="Logic AND Gate", ComponentLinkDescription=Datasheet, ComponentLinkURL=https://hr.mouser.com/datasheet/2/916/HEF4081B_Q100-1599374.pdf, FR_SN=IC_Misc-20, Part Number=HEF4081BT
U5: IC Case Style=SOT223, Manufacturer Part Number=UA78M05CDCYR, Max Input Voltage=25, Output Current=0.5A, Output Voltage=5V, Supplier Part Number=595-UA78M05CDCYR, Category="Fixed Positive Voltage Regulators", ComponentLinkDescription=Datasheet, ComponentLinkURL=http://www.ti.com/lit/ds/symlink/ua78m.pdf, FR_SN=IC_Reg-02, Part Number=UA78M05
U6: library part HCF40106, IC Case Style=SO-14, Supplier Part Number=511-HCF40106YM013TR, Category=Inverter, ComponentLinkDescription=Datasheet, ComponentLinkURL=https://hr.mouser.com/datasheet/2/389/hcf40106-1849101.pdf, FR_SN=IC_Misc-22, Manufacturer Part Number=HCF40106YM013TR, Part Number=HCF40106
U7: library part LM555, IC Case Style=SOIC-8, Manufacturer Part Number=LM555CMX/NOPB, Supplier Part Number=926-LM555CMX/NOPB, Category="Clock & Timer ICs", ComponentLinkDescription=Datasheet, ComponentLinkURL=http://www.ti.com/lit/ds/symlink/lm555.pdf, FR_SN=IC_Misc-09, Part Number=LM555

## Via types
v1: diameter 0.5, hole 0.3, Top Layer to Bottom Layer, tented both sides, 80 vias

## Nets (pads, with @x,y where several pads share a name; then routed paths per layer and width w, separated by ;. In a path a pad name is that pad's centre, name@x,y a point inside that pad or via, vN(x,y) a via of type N, cw(c..) or ccw(c..) an arc to the next point about the centre after c; other vN are vias at no path point)
+5V: C2.2 C8.1 C9.1 C10.1 C11.1 C13.1 C14.1 C15.1 C16.1 R3.3 R4.3 R5.2 R7.2 R9.2 R10.2 R11.1 R14.2 R18.3 R19.1 SW2.2 U1.4 U2.14 U3.14 U4.4 U5.3 U6.14 U7.4 U7.8 U8.14 U9.4 | length 51
  Top Layer w0.5: C8.1@16.1,16.2 16.2,16.2 16.42,16.42 17.995,16.42 U1.4 ; C11.1@16.2,4.7 16.52,5.02 17.995,5.02 U4.4 ; C9.1 26.56,12.69 28.27,12.69 U2.14 ; U3.14 33.15,9.025 C10.1 33.15,10.65 C10.1@33.2,10.7 ; C16.1@35.4,16.75 35.45,16.75 35.8,16.4 U9.4 ; U7.8 35.947,-11.482 35.947,-9.603 C14.1 ; R19.1 v1(40.39,-9.69) ; U6.14 43.31,-5.615 43.375,-5.55 C15.1 ; U8.14 43.385,1.34 43.385,1.392 44.092,1.392 44.95,2.25 C13.1
  Bottom Layer w0.5: v1(13.3,4.2) 19.8,4.2 v1(25,9.4) v1(25,11.1) ; v1(40.39,-9.69) 44.71,-9.69 45.9,-8.5 v1(45.9,-4.9) 45.9,0.6 v1(43.7,2.8)
+12V: C1.2 F1.2 R1.1 R2.1 SW1.1 U5.1 | length 73.3
  Top Layer w0.3: v1(14.6,18.9) 14.6,20.31 16.045,21.755 R1.1 16.328,21.983 16.328,22.316 16.765,22.754 17.116,23.105 17.905,23.105 C1.2@18.7,23.9 ; R2.1@16.1,10.1 R2.1 v1(16.1,11.5)
  Top Layer w1.5: F1.2@16.54,32.785 15.4,33.925 15.4,43.2 18.4,46.2 33.3,46.2 39.3,40.2 39.3,28.64 SW1.1 ; SW1.1@43.44,25.3 SW1.1@43.84,24.9
  Bottom Layer w0.3: v1(14.6,18.9) 14.6,18.1 17,15.7 17,12.4 v1(16.1,11.5)
Brake: D5.C J1.1 J1.8 R9.1 U4.3 U4.5 U4.9 | length 25.8
  Top Layer w0.3: J1.1 11.405,8.67 11.405,6.495 12.8,5.1 15.168,5.1 16.013,5.945 16.165,5.945 16.59,6.37 U4.3 18.768,6.37 18.947,6.192 18.947,6.153 19.5,5.6 19.5,4.481 19.016,3.997 18.958,3.997 18.811,3.849 18.811,3.83 U4.5 ; U4.5@18.78,3.83 20.05,2.56 U4.9
  Top Layer w0.5: J1.8 J1.1
  Bottom Layer w1.8: J1.1 J1.1@11.262,8.812 ; D5.C@14.787,8.813 D5.C
GND: C1.1 C2.1 C3.1 C4.2 C5.1 C6.2 C7.2 C8.2 C9.2 C10.2 C11.2 C13.2 C14.2 C15.2 C16.2 D1.A D2.A D4.A D5.A D6.A D9.A D10.C J1.6 Q1.2 R3.1 R4.1 R6.2 R8.1 R18.1 U1.11 U2.7 U3.5 U3.6 U3.7 U3.8 U3.9 U4.11 U5.2 U6.3 U6.5 U6.7 U6.9 U6.11 U7.1 U8.5 U8.6 U8.7 U8.8 U8.9 U8.12 U8.13 U9.11 | length 65.8
  Top Layer w0.254: R3.1 R3.1@10.1,-14.4 ; R18.1 R18.1@20.05,-14.45
  Top Layer w0.4: R3.1@10.1,-14.4 v1(11.4,-13.1) ; R18.1@20.05,-14.45 v1(21.3,-13.2)
  Top Layer w0.5: D10.C 12.195,38.2 v1(12.2,38.2) ; v1(15.3,2.4) 16.05,3.15 C11.2 ; C8.2 16.115,14.65 16.3,14.465 v1(16.3,13.8) ; v1(19.4,10.8) D2.A ; v1(19.6,22.2) D1.A ; U4.11 23.005,5.18 24.28,5.18 R6.2@24.6,5.5 ; U1.11 23.005,16.58 24.355,16.58 24.775,17 R8.1@24.9,17 ; R6.2 v1@24.9,6.5 ; R8.1 v1(24.9,18.2) ; v1(25.9,15.2) 25.972,15.2 26.265,14.907 26.265,14.435 26.45,14.25 C9.2 ; U3.7 v1(29.79,1.39) ; U3.6 v1(29.79,2.66) ; U3.5 v1(29.79,3.93) ; R4.1 29.65,-14.38 v1@30.93,-13.1 ; v1(31.41,1.39) U3.8 ; v1(31.41,2.66) U3.9 ; C10.2 v1(31.65,11.55) ; v1(31.675,20.25) U2.7 ; v1(34.85,-8.05) C14.2 ; C16.2 v1(35.3,19.5) ; v1(35.69,-2.846) U6.7 ; U8.8 v1(35.69,2.99) ; U8.7 U8.6 v1(36.96,4.61) ; U7.1 35.9,-16.66 v1(35.9,-15.2) ; v1(36.375,-4.7) 36.96,-5.285 U6.9 ; U8.9 v1(36.96,2.99) ; C4.2 v1(38.29,8.49) ; v1(38.23,-2.846) U6.5 ; v1(38.23,4.61) U8.5 ; v1(38.915,-4.7) 39.5,-5.285 U6.11 ; v1(40.6,16.4) U9.11 ; v1(40.77,-2.846) U6.3 ; U8.12 v1(40.77,2.99) ; C5.1 v1(42.65,-8.15) ; U8.13 v1(42.04,2.99) ; C7.2 v1(44.3,11) ; v1(43.5,-16.5) 44.75,-16.5 C6.2 v1(46.05,-16.45) ; C15.2 44.9,-7.15 v1(44.9,-8) ; v1(45,-0.25) C13.2 ; v1(47.4,24.4) C3.1 ; C3.1@47.5,25.5 47.495,25.505 47.495,26.89 Q1.2
  other v1: 30.9,-13.1 24.911,6.501 21.4,30.4 22.4,30.4 23.4,30.4 24.4,30.4 20.3,34.6 21.4,34.6 22.4,34.6 23.4,34.6 24.4,34.6
NetC3_2: C3.2 D8.C Q1.1 R17.1 U9.1 U9.2 | length 80.8
  Top Layer w0.5: R17.1 11.455,40.355 11.615,40.515 11.615,40.615 12.6,41.6 12.6,43.2 11.495,44.305 D8.C 11.495,44.495 11.615,44.615 11.71,44.615 16.195,49.1 46.1,49.1 48.2,47 48.2,29.096 46.804,27.7 46.052,27.7 45.65,27.297 Q1.1 45.65,26.745 45.9,26.495 C3.2 45.9,24.3 43.4,21.8 38.1,21.8 37.575,21.275 U9.1 ; U9.2 U9.1@37.575,20.175
NetC4_1: C4.1 R16.1 U3.13 | length 5.2
  Top Layer w0.3: U3.13 33.73,7.74 33.904,7.914 33.904,8.082 35.722,9.9 R16.1@35.9,9.9 ; R16.1 35.828,9.927 37.173,9.927 C4.1
NetC5_2: C5.2 U7.5 | length 3.4
  Top Layer w0.5: U7.5 40.965,-11.535 41.5,-11 C5.2
NetC6_1: C6.1 R13.1 U7.6 U7.7 | length 10.1
  Top Layer w0.5: U7.7@37.1,-11 37.135,-11 37.235,-10.9 37.235,-10.16 37.485,-9.91 37.485,-9.815 37.605,-9.695 R13.1 ; U7.7@37.2,-11.4 37.2,-11.5 U7.7@37.235,-11.535 ; U7.6@38.365,-11.065 U7.6@38.5,-11.2 ; U7.6@38.4,-11.3 38.435,-11.335 U7.6 38.505,-11.605 38.505,-12.17 39.285,-12.95 41.35,-12.95 42.8,-11.5 C6.1@44.8,-11.5
NetC7_1: C7.1 R12.1 R15.1 U9.10 | length 9.9
  Top Layer w0.3: C7.1@41.7,11.1 42.066,10.734 42.185,10.734 43.29,9.63 R15.1 ; C7.1 41.534,11.261 41.534,11.566 40.2,12.9 40.2,14.7 40.63,15.13 U9.10@41.97,15.13 ; R12.1 43.273,8.217 R15.1@43.273,9.527
NetD1_C: D1.C R1.2 U1.2 | length 5.2
  Top Layer w0.3: D1.C 17.438,21.938 17.438,21.432 16.474,20.469 16.324,20.469 R1.2 16.16,20.245 17.365,19.04 U1.2
NetD2_C: D2.C R2.2 U4.2 | length 5.2
  Top Layer w0.3: D2.C 17.43,10.53 17.43,10.04 16.135,8.745 R2.2 16.324,8.521 16.489,8.521 17.37,7.64 U4.2
NetD3_C: D3.C F1.1
NetD7_A: D7.A R12.2 | length 1.9
  Top Layer w0.3: D7.A@40,8.6 41.345,8.6 41.466,8.479 41.49,8.479 41.745,8.223 R12.2
NetD7_C: D7.C R15.2 U9.6 U9.7 | length 7.2
  Top Layer w0.5: U9.6@37.6,13.9 37.6,12.59 37.6,11.8 38.57,10.83 D7.C 39.9,10.635 39.93,10.605 39.995,10.605 40.944,9.656 41.654,9.656 R15.2
NetD8_A: D8.A R11.2 | length 1.5
  Top Layer w0.5: D8.A@9.9,44.3 9.925,44.325 9.925,45.78 R11.2
NetD9_C: D9.C Q1.3 SW1.2 | length 5.2
  Top Layer w1: SW1.2 43.04,32.225 46.41,28.855 Q1.3
NetD10_A: D10.A R17.2 | length 1.6
  Top Layer w0.5: D10.A@9.7,38.8 9.945,39.045 R17.2
NetR3_2: R3.2 U1.6 | length 34
  Top Layer w0.3: v1(8.7,5.7) 7.7,4.7 7.7,-8.05 10.616,-10.966 10.616,-10.987 11.328,-11.7 R3.2 ; v1(13.4,6.3) 14.5,7.4 14.5,11.075 16.954,13.529 16.954,13.544 17.51,14.1 U1.6@17.6,14.1
  Bottom Layer w0.3: v1(8.7,5.7) 12.746,5.7 13.346,6.3 v1(13.4,6.3) v1@13.4,6.2
NetR4_2: R4.2 U4.6 | length 39.7
  Top Layer w0.3: v1(15.8,-11) 15.8,-16 17,-17.2 25.2,-17.2 26.1,-16.3 26.1,-13 27.45,-11.65 R4.2 ; v1(15.8,-1.7) 15.8,0.99 17.51,2.7 U4.6@18,2.7
  Bottom Layer w0.3: v1(15.8,-11) v1(15.8,-1.7)
NetR5_1: R5.1 R6.1 U4.10 | length 3.2
  Top Layer w0.3: U4.10 23.092,3.997 23.982,3.997 23.986,4 24.7,4 R6.1@24.8,4.1 ; R5.1 R6.1
NetR7_1: R7.1 R8.2 U1.10 | length 3.4
  Top Layer w0.3: U1.10@23,15.1 23.295,15.395 24.735,15.395 R8.2 R7.1
NetR13_2: R13.2 R19.2 SW2.1 | length 23.5
  Top Layer w0.5: R13.2 37.703,-8.107 39.308,-8.107 R19.2@39.31,-8.11 ; R19.2 R19.2@39.31,-8.11 ; v1(40.49,-8.11) R19.2@39.31,-8.11 ; v1(45.113,9.487) SW2.1
  Bottom Layer w0.3: v1(40.49,-8.11) 42.747,-5.853 42.747,3.147 45.113,5.513 v1(45.113,9.487)
NetR14_1: R14.1 U6.12 U7.2 | length 28.1
  Top Layer w0.3: U7.2 37.182,-16.648 37.182,-15.218 v1(37.2,-15.2) ; v1(39.7,-13.846) 39.754,-13.846 40.1,-13.5 45.4,-13.5 ; U6.12@40.8,-5.5 40.8,-4.6 42.655,-2.745 R14.1 ; R14.1@45,-2.8 45,-2.89 46.6,-4.49 46.6,-12.347 45.48,-13.467 45.4,-13.467
  Bottom Layer w0.3: v1(37.2,-15.2) 38.6,-15.2 39.7,-14.1 v1(39.7,-13.846)
NetR16_2: R16.2 U6.1 U8.2 U9.8 | length 35.5
  Top Layer w0.3: R16.2 35.745,8.445 35,7.7 35,5.3 36.5,3.8 40.105,3.8 42,5.695 U8.2@42,5.8 ; v1@41.1,13.3 41.1,13.21 41.72,12.59 U9.8 ; U8.2 42.04,5.735 43.188,4.587 44.213,4.587 46.3,2.5 46.3,-0.2 45.3,-1.2 U6.1@43.4,-1.2
  Bottom Layer w0.3: v1(41,13.3) 43.2,11.1 v1(43.2,4.6)
NetR18_2: R18.2 U9.9 | length 57.7
  Top Layer w0.3: R18.2 21.48,-11.7 22.94,-10.24 32.54,-10.24 36.8,-14.5 40.664,-14.5 41.214,-13.95 45.633,-13.95 47.4,-12.183 v1@47.4,2.146 ; U9.9@43.04,13.86 43.84,13.86 47.4,10.3 v1(47.4,8.1)
  Bottom Layer w0.3: v1(47.4,2.2) v1(47.4,8.1)
NetU1_1: U1.1 U2.8 | length 10.9
  Top Layer w0.3: U1.1 20.81,20.31 21.8,21.3 25.4,21.3 26.45,20.25 28.05,20.25 U2.8@28.1,20.2
NetU1_7: U1.7 U3.1 | length 10.9
  Top Layer w0.3: U1.7 20.61,12.69 23.1,10.2 26,10.2 27.021,9.179 27.291,9.179 27.4,9.07 U3.1@27.4,9
NetU1_8: U1.8 U2.12 | length 10.9
  Top Layer w0.3: U1.8 22.925,11.575 v1(23.6,10.9) ; U2.12@28.8,15.1 28.874,15.174 29.666,15.174 v1(29.669,15.177)
  Bottom Layer w0.3: v1(23.6,10.9) 27.9,15.2 v1@29.7,15.2
NetU2_1: U2.1 U3.3 | length 10.9
  Top Layer w0.3: U3.3 29.87,6.47 30.25,6.85 30.25,11.95 30.93,12.63 U2.1
NetU2_2: U2.2 U2.11 | length 6.1
  Top Layer w0.3: U2.11 28.362,16.408 29.492,16.408 32,13.9 U2.2
NetU2_3: U2.3 U2.5 | length 5.9
  Top Layer w0.3: U2.3 31.93,15.17 31.5,15.6 31.5,17.2 32.01,17.71 33.39,17.71 U2.5@33.5,17.6
NetU2_4: U2.4 U9.5 | length 3.9
  Top Layer w0.3: U2.4@34.2,16.3 35.37,15.13 U9.5
NetU2_6: U2.6 U2.10 | length 5.8
  Top Layer w0.3: U2.10 29.71,17.71 31,19 U2.6@33.6,19
NetU2_9: U2.9 U4.1 | length 16.8
  Top Layer w0.3: U4.1 20.71,8.91 v1(22,10.2) ; v1(26.7,18.9) 26.754,18.9 26.834,18.98 U2.9
  Bottom Layer w0.3: v1(22,10.2) 22,10.225 26.7,14.925 v1(26.7,18.9)
NetU2_13: U2.13 U4.8 | length 20
  Top Layer w0.3: U4.8 23.1,1.115 23.1,0.5 23.35,0.25 25.2,0.25 26.3,1.35 26.3,8.975 v1(25.988,9.288) ; v1(27,10.3) 28.3,10.3 29.8,11.8 29.8,13.03 28.93,13.9 U2.13@28.9,13.9
  Bottom Layer w0.3: v1(25.988,9.288) v1(27,10.3)
NetU3_2: U3.2 U4.7 | length 17.5
  Top Layer w0.3: U4.7 18.78,1.29 20.27,-0.2 25.6,-0.2 26.79,0.99 26.79,7.09 27.271,7.571 27.971,7.571 U3.2@28.1,7.7
NetU3_11: U3.11 U6.13 | length 18.4
  Top Layer w0.3: U3.11@33.9,5.035 34.5,4.435 34.5,-3.511 34.989,-4 39.4,-4 v1(39.8,-4.4) ; U6.13 42.067,-5.988 42.067,-4.427 v1(42.093,-4.4)
  Bottom Layer w0.3: v1(39.8,-4.4) v1(42.093,-4.4)
NetU3_12: U3.12 U6.2 | length 20.1
  Top Layer w0.3: U3.12 33.239,6.366 34.224,6.366 34.41,6.18 34.41,5.19 34.95,4.65 34.95,-3.324 35.126,-3.5 41.2,-3.5 42.04,-2.66 U6.2
NetU7_3: U7.3 U8.1 | length 34.4
  Top Layer w0.3: U7.3 38.435,-16.1 39.135,-15.4 40.4,-15.4 41.35,-14.45 45.85,-14.45 48.154,-12.146 48.154,5.346 47,6.5 U8.1@43.6,6.5
NetU8_3: U8.3 U9.3 | length 12.6
  Top Layer w0.3: U9.3@38.362,17.6 38.9,17.6 39.4,17.1 v1(39.4,12.7) ; v1(40.7,7.8) 40.77,7.73 U8.3
  Bottom Layer w0.3: v1(39.4,12.7) 39.4,12.6 40.7,11.3 v1(40.7,7.8)
Out1: J1.4 SW1.3 | length 23
  Bottom Layer w2.5: J1.4 20.575,32.5 SW1.3
Out2: J1.3 SW1.4 | length 19.1
  Bottom Layer w2.5: J1.3 11.591,18.73 12.221,19.36 12.56,19.36 18.1,24.9 SW1.4
Throttle: D6.C J1.2 J1.7 R10.1 U1.3 U1.5 U1.9 | length 24.9
  Top Layer w0.3: J1.2 11.25,14.05 14.6,17.4 16.1,17.4 17.014,17.4 17.203,17.589 17.203,17.592 17.382,17.77 U1.3 18.242,17.603 19.097,17.603 19.6,17.1 19.6,16.1 18.947,15.447 18.947,15.408 18.768,15.23 U1.5 ; U1.5@18.78,15.23 20.05,13.96 U1.9
  Top Layer w0.5: J1.7 J1.2
VIN: D3.A D4.C J1.5 | length 14
  Top Layer w2: J1.5 5.351,23.175 8.576,26.4 14.7,26.4 D3.A@16.7,24.4
pads on no net: J1. U1.12 U1.13 U1.14 U3.4 U3.10 U4.12 U4.13 U4.14 U6.4 U6.6 U6.8 U6.10 U8.4 U8.10 U8.11 U9.12 U9.13 U9.14

## Polygon pours and split planes (outlines as drawn)
GND on Bottom Layer "Bottom Layer-GND" (solid, pour order 5): -9.464,-17.23 -9.464,36.63 ccw(c-9.469,36.63) -9.465,36.633 -9.465,49.33 cw(c-8.2,49.33) -8.2,50.595 47.93,50.595 cw(c47.93,49.33) 49.195,49.33 49.195,-17.23 cw(c47.93,-17.23) 47.93,-18.495 -8.2,-18.495 cw(c-8.2,-18.5) -8.2,-18.495 ccw(c-8.199,-17.23) -8.199,-18.495 -8.2,-18.495 cw(c-8.199,-17.23)
+5V on Top Layer "Top Layer-+5V" (solid, pour order 6): -9.464,-17.23 -9.464,36.63 ccw(c-9.469,36.63) -9.465,36.633 -9.465,49.33 cw(c-8.2,49.33) -8.2,50.595 47.93,50.595 cw(c47.93,49.33) 49.195,49.33 49.195,-17.23 cw(c47.93,-17.23) 47.93,-18.495 -8.2,-18.495 cw(c-8.2,-18.5) -8.2,-18.495 ccw(c-8.199,-17.23) -8.199,-18.495 -8.2,-18.495 cw(c-8.199,-17.23)

## Other copper
Top Layer:
  rectangle net NetC6_1: 37.1,-12.3 38.5,-10.8
  region net GND: 26.3,33.8 26.9,34.4 29.1,34.4 29.5,34.8 29.5,40.9 28.8,41.6 18.4,41.6 17.2,40.4 17.2,35 20.8,31.4 20.8,23.8 21.2,23.4 24.2,23.4 24.5,23.7 24.5,25.4 24.3,25.6 23.9,25.6 23.5,26 23.5,27.6 23.9,28 25.6,28 26.3,28.7
  region net +12V: 20.2,23.4 20.5,23.7 20.5,31.2 18.4,33.3 15.8,33.3 15.5,33 15.5,31.5 16,31 17.7,31 18.2,30.5 18.2,23.6 18.4,23.4
  region net NetD3_C: 15.9,27 15.5,27.4 15.5,30.1 15.8,30.4 17.6,30.4 17.9,30.1 17.9,27.3 17.6,27
Bottom Layer:
  region net NetD9_C: 42.94,33.85 39.44,33.85 39.04,33.45 39.04,31.65 39.44,31.25 43.04,31.25 43.04,33.75
  region net GND: 4.9,20.655 0.2,20.655 -0.3,20.155 -0.3,18 0.845,16.855 4.9,16.855
  region net VIN: 4.9,25.1 0.2,25.1 -0.3,24.6 -0.3,22 0.4,21.3 4.9,21.3
  region net Throttle: 11.187,15.158 15.287,15.158 15.687,14.758 15.687,11.887 15.157,11.357 11.287,11.358 11.187,11.458
  region net Brake: 11.2,10.7 15.3,10.7 15.7,10.3 15.7,7.2 15.4,6.9 11.3,6.9 11.2,7

## Silkscreen, mask and mechanical layers (free items; w line width, h text height)
Top Overlay:
  drawing of 767 lines, arcs and shapes, not listed
  text "OFF" at 9.4,41.9 h1
  text "BSPD STATE" at 8.3,36.63 h1 r90
  text "ON" at 9.7,36.6 h1
  text "BSPD V2.0" at 20.2,35.2 h2.5
  text "FSAE" at 44.54,20.04 h1
  text "FSG" at 44.94,6.44 h1
  text "Throttle / Sensitivity" at 5.4,-6.6 h0.9
  text "Brake / Sensitivity" at 14.8,-6.7 h0.9
  text "Switch / Delay" at 26.7,-6.7 h0.9
  text "Less" at 8.9,-8.8 h1
  text "Less" at 18.8,-8.8 h1
  text "Slower" at 28.4,-8.8 h1
  text "More" at 7,-15.4 h1 r90
  text "More" at 16.9,-15.4 h1 r90
  text "Faster" at 26.5,-15.4 h1 r90
Outline and holes:
  lines w0.01: 38.301,50.6 47.931,50.6 cw(c47.931,49.33) 49.201,49.33 49.201,-17.23 cw(c47.931,-17.23) 47.931,-18.5 39.201,-18.5 ; -9.469,-17.23 ccw(c-8.199,-17.23) -8.199,-18.5 ; -9.469,-17.23 ccw(c-8.199,-17.23) -8.199,-18.5 ; -9.469,-17.23 ccw(c-8.199,-17.23) -8.199,-18.5 ; -9.469,-17.23 ccw(c-8.199,-17.23) -8.199,-18.5 ; -9.469,-17.23 -9.469,31.5 ; -9.469,-17.23 -9.469,31.5 ; -9.469,-17.23 -9.469,31.5 ; -9.469,-17.23 -9.469,31.5 ; -9.469,31.5 -9.469,36.63 ; -9.469,31.5 -9.469,36.63 ; -9.469,31.5 -9.469,36.63 ; -9.469,31.5 -9.469,36.63 ; -9.469,49.33 cw(c-8.199,49.33) -8.199,50.6 ; -9.469,49.33 cw(c-8.199,49.33) -8.199,50.6 ; -9.469,49.33 -9.469,35.4 -9.469,49.33 ; -9.468,-17.23 ccw(c-8.198,-17.23) -8.198,-18.5 ; -9.468,-17.23 ccw(c-8.198,-17.23) -8.198,-18.5 ; -9.468,-17.23 ccw(c-8.198,-17.23) -8.198,-18.5 ; -9.468,-17.23 ccw(c-8.198,-17.23) -8.198,-18.5 ; -9.468,-17.23 -9.468,31.5 ; -9.468,-17.23 -9.468,31.5 ; -9.468,-17.23 -9.468,31.5 ; -9.468,-17.23 -9.468,31.5 ; -9.468,31.5 -9.468,36.63 ; -9.468,31.5 -9.468,36.63 ; -9.468,31.5 -9.468,36.63 ; -9.468,31.5 -9.468,36.63 ; -8.199,-18.5 39.231,-18.5 -8.199,-18.5 ; -8.199,50.6 39.231,50.6 -8.199,50.6